# EAGLE board 4T-audio-amp-multi (EAGLE 5.07)
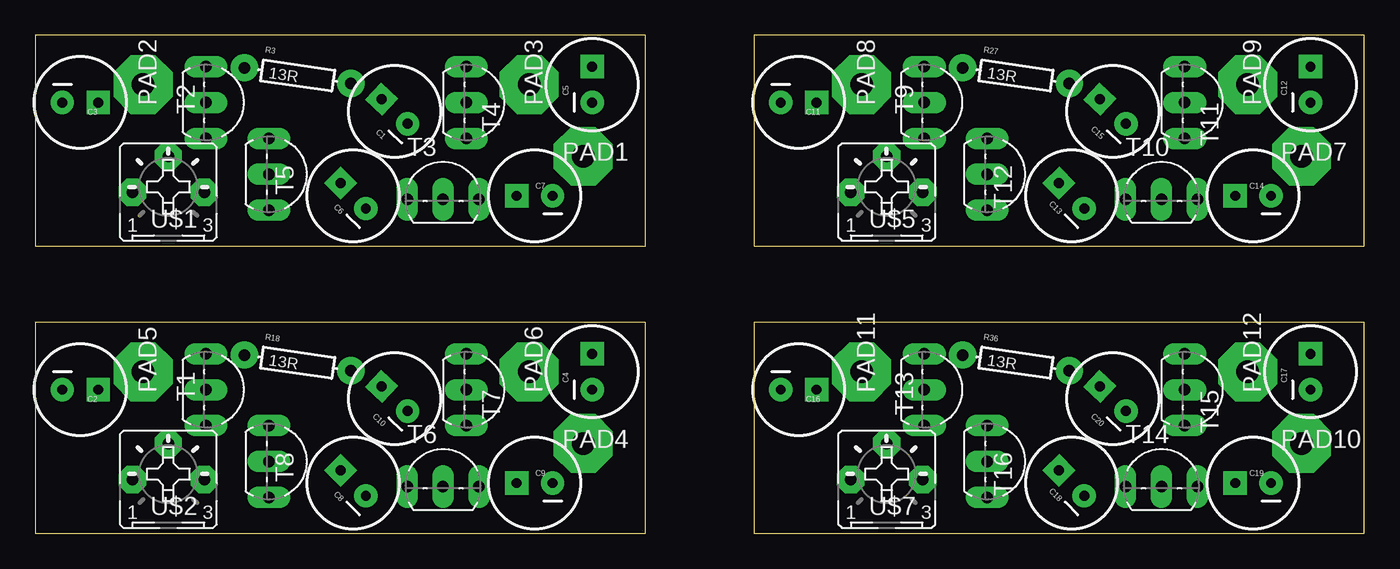
[diagram p0: board, top side]
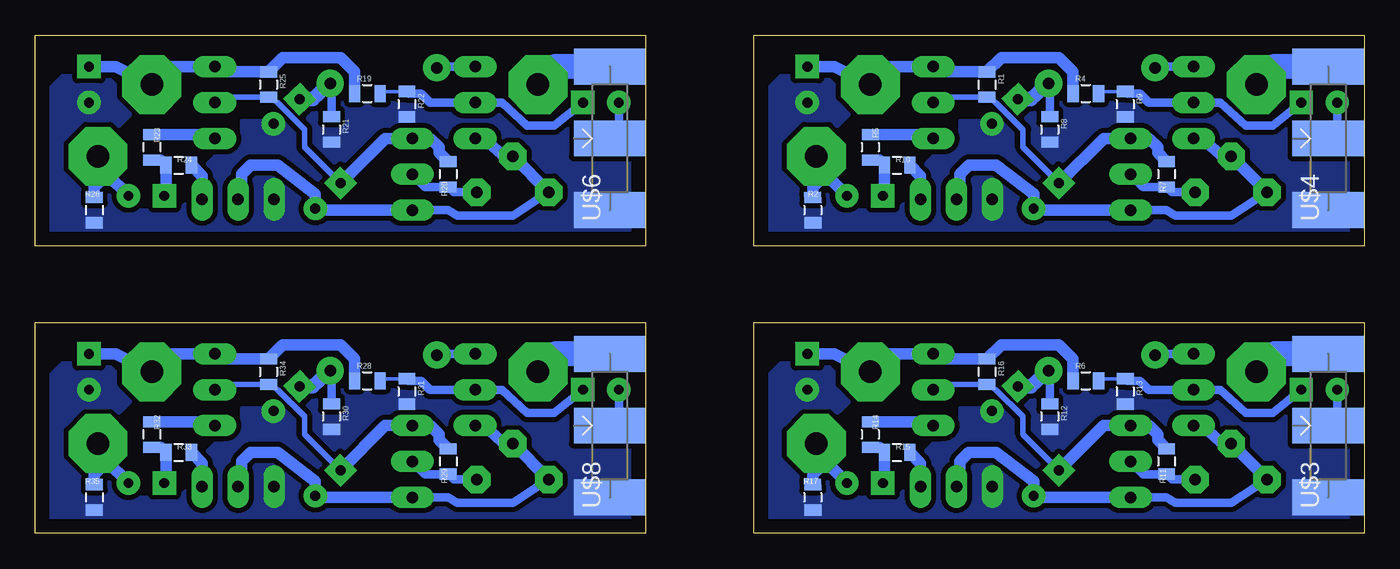
[diagram p1: board, bottom side, seen from below]

Size 93.96 x 35.23 mm. Coordinates in mm from the lower left corner, seen from the top.
Outline: 0,20.32 43.16,20.32 43.16,35.23 0,35.23 0,20.32
Outline: 0,0 43.16,0 43.16,14.91 0,14.91 0,0
Outline: 50.8,20.32 93.96,20.32 93.96,35.23 50.8,35.23 50.8,20.32
Outline: 50.8,0 93.96,0 93.96,14.91 50.8,14.91 50.8,0
Copper layers (1*16): Top 0.035mm / dielectric 1.5mm / Bottom 0.035mm
Design rules "default": minimum track width 10mil, minimum drill 24mil, track to track 8mil, track to pad 8mil, pad to pad 8mil, via to via 8mil, smd to smd 8mil, copper to edge 40mil, drill to drill 8mil, minimum pad ring 10mil, minimum via ring 8mil, stop-mask expansion 4mil, vias tented up to drill 0mil, thermal gap 10mil

## Footprints (pad centres in the part's own frame; a part is rotated, then mirrored left to right if it is on the bottom)
CPOL-RADIAL-100UF-25V = drill 0.7 pad 1.651 square: 1 1.27,0 | drill 0.7 pad 1.651 round: 2 -1.27,0
4,16O1,6 = drill 1.6 pad 4.166 octagon: 1 0,0
0805 = smd 0.8 x 1.2: 1 -0.9,0; 2 0.9,0
AXIAL-0.3 = drill 0.813 pad 1.93 round: P$1 -3.81,0; P$2 3.81,0
TO92-EBC = drill 0.813 pad 1.524 long: B 0,-1.27; C 2.54,-1.27; E -2.54,-1.27
B25P = drill 0.813 pad 1.93 octagon: A -2.54,0; E 2.54,0; S 0,2.54
POT-PANNEL = smd 2.54 x 5.08: A -6.35,0; E 3.81,0; S -1.27,0

## Placement (x,y rotation side)
C1  470uF  [CPOL-RADIAL-100UF-25V]  25.4,29.84 136.6 top
C2  470uF  [CPOL-RADIAL-100UF-25V]  3.17,10.16 0 top
C3  470uF  [CPOL-RADIAL-100UF-25V]  3.17,30.48 0 top
C4  470uF  [CPOL-RADIAL-100UF-25V]  39.37,11.43 90 top
C5  470uF  [CPOL-RADIAL-100UF-25V]  39.37,31.75 90 top
C6  100uF  [CPOL-RADIAL-100UF-25V]  22.48,23.88 134.6 top
C7  470uF  [CPOL-RADIAL-100UF-25V]  35.31,23.88 180 top
C8  100uF  [CPOL-RADIAL-100UF-25V]  22.48,3.56 134.6 top
C9  470uF  [CPOL-RADIAL-100UF-25V]  35.31,3.56 180 top
C10  470uF  [CPOL-RADIAL-100UF-25V]  25.4,9.53 136.6 top
C11  470uF  [CPOL-RADIAL-100UF-25V]  53.98,30.48 0 top
C12  470uF  [CPOL-RADIAL-100UF-25V]  90.17,31.75 90 top
C13  100uF  [CPOL-RADIAL-100UF-25V]  73.28,23.88 134.6 top
C14  470uF  [CPOL-RADIAL-100UF-25V]  86.11,23.88 180 top
C15  470uF  [CPOL-RADIAL-100UF-25V]  76.2,29.84 136.6 top
C16  470uF  [CPOL-RADIAL-100UF-25V]  53.98,10.16 0 top
C17  470uF  [CPOL-RADIAL-100UF-25V]  90.17,11.43 90 top
C18  100uF  [CPOL-RADIAL-100UF-25V]  73.28,3.56 134.6 top
C19  470uF  [CPOL-RADIAL-100UF-25V]  86.11,3.56 180 top
C20  470uF  [CPOL-RADIAL-100UF-25V]  76.2,9.53 136.6 top
PAD1  OUT  [4,16O1,6]  38.73,26.67 0 top
PAD2  OUT  [4,16O1,6]  7.62,31.75 0 top
PAD3  Power  [4,16O1,6]  34.92,31.75 0 top
PAD4  OUT  [4,16O1,6]  38.73,6.35 0 top
PAD5  OUT  [4,16O1,6]  7.62,11.43 0 top
PAD6  Power  [4,16O1,6]  34.92,11.43 0 top
PAD7  OUT  [4,16O1,6]  89.53,26.67 0 top
PAD8  OUT  [4,16O1,6]  58.42,31.75 0 top
PAD9  Power  [4,16O1,6]  85.72,31.75 0 top
PAD10  OUT  [4,16O1,6]  89.53,6.35 0 top
PAD11  OUT  [4,16O1,6]  58.42,11.43 0 top
PAD12  Power  [4,16O1,6]  85.72,11.43 0 top
R1  270R  [0805]  26.67,31.75 270 bottom
R2  1k  [0805]  38.99,22.86 270.2 bottom
R3  13R  [AXIAL-0.3]  18.54,32.38 351.7 top
R4  6.2k  [0805]  19.68,31.12 0 bottom
R5  1R  [0805]  34.92,27.3 270 bottom
R6  6.2k  [0805]  19.68,10.79 0 bottom
R7  620  [0805]  13.97,25.4 270 bottom
R8  47R  [0805]  22.23,28.58 270 bottom
R9  1.2k  [0805]  16.89,30.35 270 bottom
R10  1R  [0805]  33.02,26.04 0 bottom
R11  620  [0805]  13.97,5.08 270 bottom
R12  47R  [0805]  22.23,8.26 270 bottom
R13  1.2k  [0805]  16.89,10.03 270 bottom
R14  1R  [0805]  34.92,6.98 270 bottom
R15  1R  [0805]  33.02,5.71 0 bottom
R16  270R  [0805]  26.67,11.43 270 bottom
R17  1k  [0805]  38.99,2.54 270.2 bottom
R18  13R  [AXIAL-0.3]  18.54,12.06 351.7 top
R19  6.2k  [0805]  70.48,31.12 0 bottom
R20  620  [0805]  64.77,25.4 270 bottom
R21  47R  [0805]  73.03,28.58 270 bottom
R22  1.2k  [0805]  67.69,30.35 270 bottom
R23  1R  [0805]  85.72,27.3 270 bottom
R24  1R  [0805]  83.82,26.04 0 bottom
R25  270R  [0805]  77.47,31.75 270 bottom
R26  1k  [0805]  89.79,22.86 270.2 bottom
R27  13R  [AXIAL-0.3]  69.34,32.38 351.7 top
R28  6.2k  [0805]  70.48,10.79 0 bottom
R29  620  [0805]  64.77,5.08 270 bottom
R30  47R  [0805]  73.03,8.26 270 bottom
R31  1.2k  [0805]  67.69,10.03 270 bottom
R32  1R  [0805]  85.72,6.98 270 bottom
R33  1R  [0805]  83.82,5.71 0 bottom
R34  270R  [0805]  77.47,11.43 270 bottom
R35  1k  [0805]  89.79,2.54 270.2 bottom
R36  13R  [AXIAL-0.3]  69.34,12.06 351.7 top
T1  9013  [TO92-EBC]  13.34,10.16 270 top
T2  9013  [TO92-EBC]  13.34,30.48 270 top
T3  8050  [TO92-EBC]  28.83,24.89 0 top
T4  8550  [TO92-EBC]  31.75,30.48 270 top
T5  [TO92-EBC]  17.78,25.4 270 top
T6  8050  [TO92-EBC]  28.83,4.57 0 top
T7  8550  [TO92-EBC]  31.75,10.16 270 top
T8  [TO92-EBC]  17.78,5.08 270 top
T9  9013  [TO92-EBC]  64.14,30.48 270 top
T10  8050  [TO92-EBC]  79.63,24.89 0 top
T11  8550  [TO92-EBC]  82.55,30.48 270 top
T12  [TO92-EBC]  68.58,25.4 270 top
T13  9013  [TO92-EBC]  64.14,10.16 270 top
T14  8050  [TO92-EBC]  79.63,4.57 0 top
T15  8550  [TO92-EBC]  82.55,10.16 270 top
T16  [TO92-EBC]  68.58,5.08 270 top
U$1  1k  [B25P]  9.4,24.13 0 top
U$2  1k  [B25P]  9.4,3.81 0 top
U$3  4.7k  [POT-PANNEL]  2.54,6.35 270 bottom
U$4  4.7k  [POT-PANNEL]  2.54,26.67 270 bottom
U$5  1k  [B25P]  60.2,24.13 0 top
U$6  4.7k  [POT-PANNEL]  53.34,26.67 270 bottom
U$7  1k  [B25P]  60.2,3.81 0 top
U$8  4.7k  [POT-PANNEL]  53.34,6.35 270 bottom

## Library data of the parts
C1-C20 R1-R36 T1-T16 U$1-U$8 = digital-toy
PAD1-PAD12 = wirepad

## Nets
GND: C1.2 C5.2 R2.2 R8.2 R9.2 T3.E U$4.E
GND1: C4.2 C10.2 R12.2 R13.2 R17.2 T6.E U$3.E
GND2: C12.2 C15.2 R21.2 R22.2 R26.2 T10.E U$6.E
GND3: C17.2 C20.2 R30.2 R31.2 R35.2 T14.E U$8.E
N$1: R5.1 T4.C
N$2: R3.P$1 T2.E
N$3: C6.2 T2.C T3.B T5.C U$1.A U$1.S
N$4: C7.1 R5.2 R10.1
N$5: R10.2 T3.C
N$6: C1.1 R3.P$2 R8.1
N$7: R7.2 T5.B U$1.E
N$8: C6.1 R1.2 R7.1 T4.B T5.E
N$9: C7.2 PAD1.1 R2.1
N$10: C3.1 R4.2 R9.1 T2.B
N$11: PAD2.1 U$4.A
N$12: C3.2 U$4.S
N$13: R14.1 T7.C
N$14: C9.1 R14.2 R15.1
N$15: R15.2 T6.C
N$16: C8.2 T1.C T6.B T8.C U$2.A U$2.S
N$17: R11.2 T8.B U$2.E
N$18: C10.1 R12.1 R18.P$2
N$19: C2.1 R6.2 R13.1 T1.B
N$20: PAD5.1 U$3.A
N$21: C8.1 R11.1 R16.2 T7.B T8.E
N$22: R18.P$1 T1.E
N$23: C9.2 PAD4.1 R17.1
N$24: C2.2 U$3.S
N$25: R23.1 T11.C
N$26: C14.1 R23.2 R24.1
N$27: R24.2 T10.C
N$28: C13.2 T9.C T10.B T12.C U$5.A U$5.S
N$29: R20.2 T12.B U$5.E
N$30: C15.1 R21.1 R27.P$2
N$31: C11.1 R19.2 R22.1 T9.B
N$32: PAD8.1 U$6.A
N$33: C13.1 R20.1 R25.2 T11.B T12.E
N$34: R27.P$1 T9.E
N$35: C14.2 PAD7.1 R26.1
N$36: C11.2 U$6.S
N$37: R32.1 T15.C
N$38: C19.1 R32.2 R33.1
N$39: R33.2 T14.C
N$40: C18.2 T13.C T14.B T16.C U$7.A U$7.S
N$41: R29.2 T16.B U$7.E
N$42: C20.1 R30.1 R36.P$2
N$43: C16.1 R28.2 R31.1 T13.B
N$44: PAD11.1 U$8.A
N$45: C18.1 R29.1 R34.2 T15.B T16.E
N$46: R36.P$1 T13.E
N$47: C19.2 PAD10.1 R35.1
N$48: C16.2 U$8.S
VCC: C5.1 PAD3.1 R1.1 R4.1 T4.E
VCC1: C4.1 PAD6.1 R6.1 R16.1 T7.E
VCC2: C12.1 PAD9.1 R19.1 R25.1 T11.E
VCC3: C17.1 PAD12.1 R28.1 R34.1 T15.E

## Tracks (layer width: path | path; a pad name or v marks a point on that pad's centre or on a via)
GND
  pour Bottom (isolate 0.356, no thermals): -2.54,27.94 5.08,27.94 5.71,29.21 9.53,29.21 10.79,30.48 22.86,30.48 24.13,29.21 28.57,29.21 28.57,27.94 29.84,26.67 30.48,26.67 32.38,24.77 32.38,23.5 33.02,22.86 36.83,22.86 38.1,24.13 38.1,27.94 36.2,29.84 36.2,30.48 38.1,32.38 41.27,32.38 45.09,28.58 45.09,21.59 41.91,18.41 -0.64,18.41 -2.54,20.32
GND1
  pour Bottom (isolate 0.356, no thermals): -2.54,7.62 5.08,7.62 5.71,8.89 9.53,8.89 10.79,10.16 22.86,10.16 24.13,8.89 28.57,8.89 28.57,7.62 29.84,6.35 30.48,6.35 32.38,4.45 32.38,3.18 33.02,2.54 36.83,2.54 38.1,3.81 38.1,7.62 36.2,9.53 36.2,10.16 38.1,12.06 41.27,12.06 45.09,8.26 45.09,1.27 41.91,-1.91 -0.64,-1.91 -2.54,0
GND2
  pour Bottom (isolate 0.356, no thermals): 48.26,27.94 55.88,27.94 56.52,29.21 60.33,29.21 61.59,30.48 73.66,30.48 74.93,29.21 79.38,29.21 79.38,27.94 80.64,26.67 81.28,26.67 83.19,24.77 83.19,23.5 83.82,22.86 87.63,22.86 88.9,24.13 88.9,27.94 87,29.84 87,30.48 88.9,32.38 92.08,32.38 95.89,28.58 95.89,21.59 92.71,18.41 50.16,18.41 48.26,20.32
GND3
  pour Bottom (isolate 0.356, no thermals): 48.26,7.62 55.88,7.62 56.52,8.89 60.33,8.89 61.59,10.16 73.66,10.16 74.93,8.89 79.38,8.89 79.38,7.62 80.64,6.35 81.28,6.35 83.19,4.45 83.19,3.18 83.82,2.54 87.63,2.54 88.9,3.81 88.9,7.62 87,9.53 87,10.16 88.9,12.06 92.08,12.06 95.89,8.26 95.89,1.27 92.71,-1.91 50.16,-1.91 48.26,0
N$1
  Bottom 0.813: T4.C 30.75,28.2 R5.1
N$2
  Bottom 0.61: T2.E 14.85,33.02 R3.P$1
N$3
  Bottom 0.254: 23.26,22.86 C6.2
  Bottom 0.61: T5.C 13.97,22.86 13.34,22.48 9.4,22.48 U$1.A
  Bottom 0.813: T2.C 11.43,27.94 10.16,26.8 U$1.S U$1.A | T5.C 23.26,22.86 | C6.2 23.37,24.01 26.04,26.04 27.94,26.04 28.57,25.4 28.57,23.88 T3.B
N$4
  Bottom 0.254: R10.1 34.29,26.41
  Bottom 0.813: 34.29,26.41 R5.2 | R10.1 33.92,24.63 C7.1
N$5
  Bottom 0.813: T3.C 31.37,25.28 R10.2
N$6
  Bottom 0.61: R8.1 22.23,31.11 R3.P$2
  Bottom 1.016: C1.1 23.56,30.72 R3.P$2
N$7
  Bottom 0.61: U$1.E 13.6,24.13 R7.2 15.61,24.5 T5.B
N$8
  Bottom 0.254: 21.57,24.78 C6.1
  Bottom 0.406: C6.1 24.13,27.32 24.13,28.58 26.04,30.48 R1.2 30.11,30.85 T4.B
  Bottom 0.813: 21.57,24.78 18.41,27.94 T5.E 15.24,27.94 14.61,27.3 14.61,26.94 R7.1
N$9
  Bottom 0.813: C7.2 38.1,25.4 | 38.1,25.4 PAD1.1 | R2.1 38.99,24.51 38.1,25.4
N$10
  Bottom 0.254: 16.75,31.12 R9.1 18.65,31.25 R4.2
  Bottom 0.61: C3.1 6.48,28.83 8.38,28.83 10.16,30.48 T2.B 15.24,30.48 15.88,31.12 16.75,31.12
N$11
  Bottom 1.778: U$4.A 6.35,33.02 PAD2.1
N$12
  Bottom 0.254: 1.91,29.21 U$4.S
  Bottom 0.61: 1.91,29.21 C3.2
N$13
  Bottom 0.813: T7.C 30.75,7.88 R14.1
N$14
  Bottom 0.254: R15.1 34.29,6.09
  Bottom 0.813: 34.29,6.09 R14.2 | R15.1 33.92,4.31 C9.1
N$15
  Bottom 0.813: T6.C 31.37,4.96 R15.2
N$16
  Bottom 0.254: 23.26,2.54 C8.2
  Bottom 0.61: T8.C 13.97,2.54 13.34,2.16 9.4,2.16 U$2.A
  Bottom 0.813: T1.C 11.43,7.62 10.16,6.48 U$2.S U$2.A | T8.C 23.26,2.54 | C8.2 23.37,3.69 26.04,5.71 27.94,5.71 28.57,5.08 28.57,3.56 T6.B
N$17
  Bottom 0.61: U$2.E 13.6,3.81 R11.2 15.61,4.18 T8.B
N$18
  Bottom 0.61: R12.1 22.23,10.79 R18.P$2
  Bottom 1.016: C10.1 23.56,10.4 R18.P$2
N$19
  Bottom 0.254: 16.75,10.79 R13.1 18.65,10.93 R6.2
  Bottom 0.61: C2.1 6.48,8.51 8.38,8.51 10.16,10.16 T1.B 15.24,10.16 15.88,10.79 16.75,10.79
N$20
  Bottom 1.778: U$3.A 6.35,12.7 PAD5.1
N$21
  Bottom 0.254: 21.57,4.46 C8.1
  Bottom 0.406: C8.1 24.13,7 24.13,8.26 26.04,10.16 R16.2 30.11,10.53 T7.B
  Bottom 0.813: 21.57,4.46 18.41,7.62 T8.E 15.24,7.62 14.61,6.98 14.61,6.62 R11.1
N$22
  Bottom 0.61: T1.E 14.85,12.7 R18.P$1
N$23
  Bottom 0.813: C9.2 38.1,5.08 | 38.1,5.08 PAD4.1 | R17.1 38.99,4.19 38.1,5.08
N$24
  Bottom 0.254: 1.91,8.89 U$3.S
  Bottom 0.61: 1.91,8.89 C2.2
N$25
  Bottom 0.813: T11.C 81.55,28.2 R23.1
N$26
  Bottom 0.254: R24.1 85.09,26.41
  Bottom 0.813: 85.09,26.41 R23.2 | R24.1 84.72,24.63 C14.1
N$27
  Bottom 0.813: T10.C 82.17,25.28 R24.2
N$28
  Bottom 0.254: 74.06,22.86 C13.2
  Bottom 0.61: T12.C 64.77,22.86 64.14,22.48 60.2,22.48 U$5.A
  Bottom 0.813: T9.C 62.23,27.94 60.96,26.8 U$5.S U$5.A | T12.C 74.06,22.86 | C13.2 74.17,24.01 76.83,26.04 78.74,26.04 79.38,25.4 79.38,23.88 T10.B
N$29
  Bottom 0.61: U$5.E 64.4,24.13 R20.2 66.41,24.5 T12.B
N$30
  Bottom 0.61: R21.1 73.03,31.11 R27.P$2
  Bottom 1.016: C15.1 74.36,30.72 R27.P$2
N$31
  Bottom 0.254: 67.55,31.12 R22.1 69.45,31.25 R19.2
  Bottom 0.61: C11.1 57.28,28.83 59.18,28.83 60.96,30.48 T9.B 66.04,30.48 66.67,31.12 67.55,31.12
N$32
  Bottom 1.778: U$6.A 57.15,33.02 PAD8.1
N$33
  Bottom 0.254: 72.38,24.78 C13.1
  Bottom 0.406: C13.1 74.93,27.32 74.93,28.58 76.83,30.48 R25.2 80.91,30.85 T11.B
  Bottom 0.813: 72.38,24.78 69.22,27.94 T12.E 66.04,27.94 65.41,27.3 65.41,26.94 R20.1
N$34
  Bottom 0.61: T9.E 65.65,33.02 R27.P$1
N$35
  Bottom 0.813: C14.2 88.9,25.4 | 88.9,25.4 PAD7.1 | R26.1 89.79,24.51 88.9,25.4
N$36
  Bottom 0.254: 52.7,29.21 U$6.S
  Bottom 0.61: 52.7,29.21 C11.2
N$37
  Bottom 0.813: T15.C 81.55,7.88 R32.1
N$38
  Bottom 0.254: R33.1 85.09,6.09
  Bottom 0.813: 85.09,6.09 R32.2 | R33.1 84.72,4.31 C19.1
N$39
  Bottom 0.813: T14.C 82.17,4.96 R33.2
N$40
  Bottom 0.254: 74.06,2.54 C18.2
  Bottom 0.61: T16.C 64.77,2.54 64.14,2.16 60.2,2.16 U$7.A
  Bottom 0.813: T13.C 62.23,7.62 60.96,6.48 U$7.S U$7.A | T16.C 74.06,2.54 | C18.2 74.17,3.69 76.83,5.71 78.74,5.71 79.38,5.08 79.38,3.56 T14.B
N$41
  Bottom 0.61: U$7.E 64.4,3.81 R29.2 66.41,4.18 T16.B
N$42
  Bottom 0.61: R30.1 73.03,10.79 R36.P$2
  Bottom 1.016: C20.1 74.36,10.4 R36.P$2
N$43
  Bottom 0.254: 67.55,10.79 R31.1 69.45,10.93 R28.2
  Bottom 0.61: C16.1 57.28,8.51 59.18,8.51 60.96,10.16 T13.B 66.04,10.16 66.67,10.79 67.55,10.79
N$44
  Bottom 1.778: U$8.A 57.15,12.7 PAD11.1
N$45
  Bottom 0.254: 72.38,4.46 C18.1
  Bottom 0.406: C18.1 74.93,7 74.93,8.26 76.83,10.16 R34.2 80.91,10.53 T15.B
  Bottom 0.813: 72.38,4.46 69.22,7.62 T16.E 66.04,7.62 65.41,6.98 65.41,6.62 R29.1
N$46
  Bottom 0.61: T13.E 65.65,12.7 R36.P$1
N$47
  Bottom 0.813: C19.2 88.9,5.08 | 88.9,5.08 PAD10.1 | R35.1 89.79,4.19 88.9,5.08
N$48
  Bottom 0.254: 52.7,8.89 U$8.S
  Bottom 0.61: 52.7,8.89 C16.2
VCC
  Bottom 0.254: 30.11,32.65 T4.E
  Bottom 0.813: C5.1 37.47,33.02 PAD3.1 33.66,33.02 T4.E | 30.11,32.65 R1.1 25.66,33.66 21.59,33.66 20.59,32.65 R4.1
VCC1
  Bottom 0.254: 30.11,12.33 T7.E
  Bottom 0.813: C4.1 37.47,12.7 PAD6.1 33.66,12.7 T7.E | 30.11,12.33 R16.1 25.66,13.34 21.59,13.34 20.59,12.33 R6.1
VCC2
  Bottom 0.254: 80.91,32.65 T11.E
  Bottom 0.813: C12.1 88.27,33.02 PAD9.1 84.45,33.02 T11.E | 80.91,32.65 R25.1 76.47,33.66 72.39,33.66 71.39,32.65 R19.1
VCC3
  Bottom 0.254: 80.91,12.33 T15.E
  Bottom 0.813: C17.1 88.27,12.7 PAD12.1 84.45,12.7 T15.E | 80.91,12.33 R34.1 76.47,13.34 72.39,13.34 71.39,12.33 R28.1